# Altium PCB KBV1.3.PcbDoc
Units mil, origin at the board's own origin, x right, y up, seen from the top; angles counter-clockwise.
Board outline 11250.06 x 3738.1 mil, 2 copper layers (Top Layer, Bottom Layer); 151 components, 147 nets, 722 pads, 47 vias.
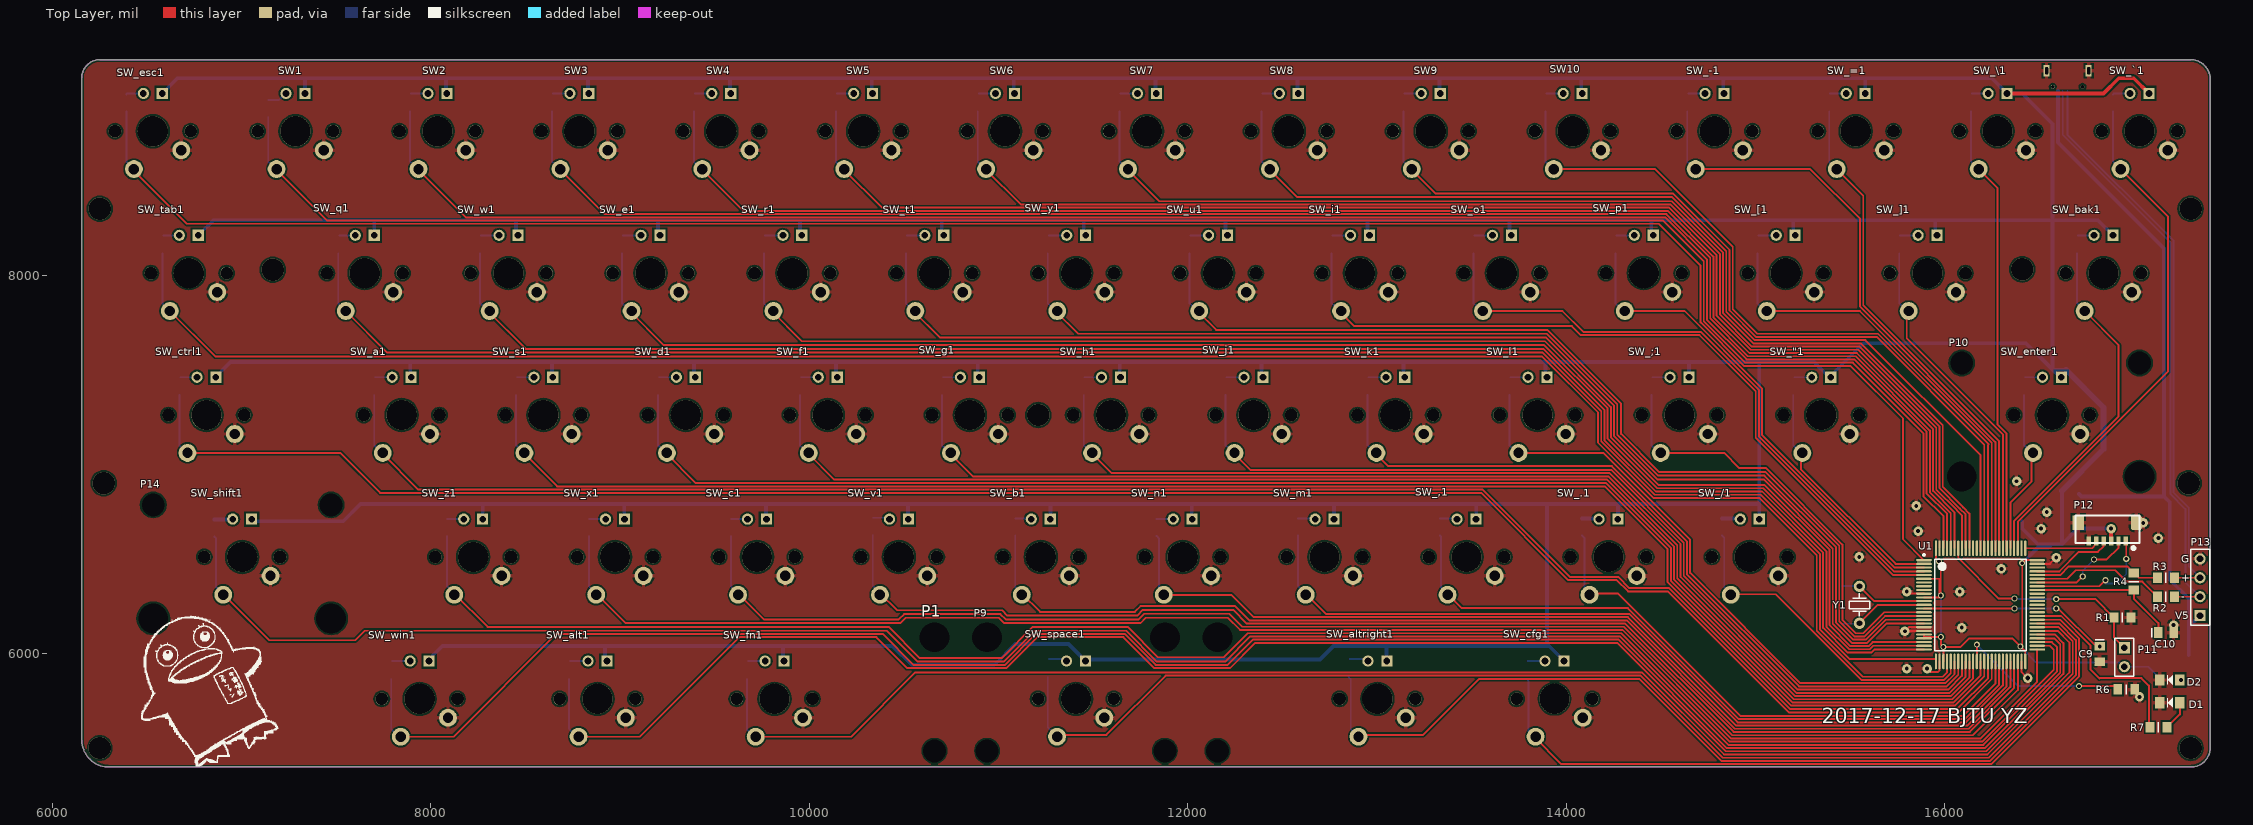
[diagram p0: Top Layer view]
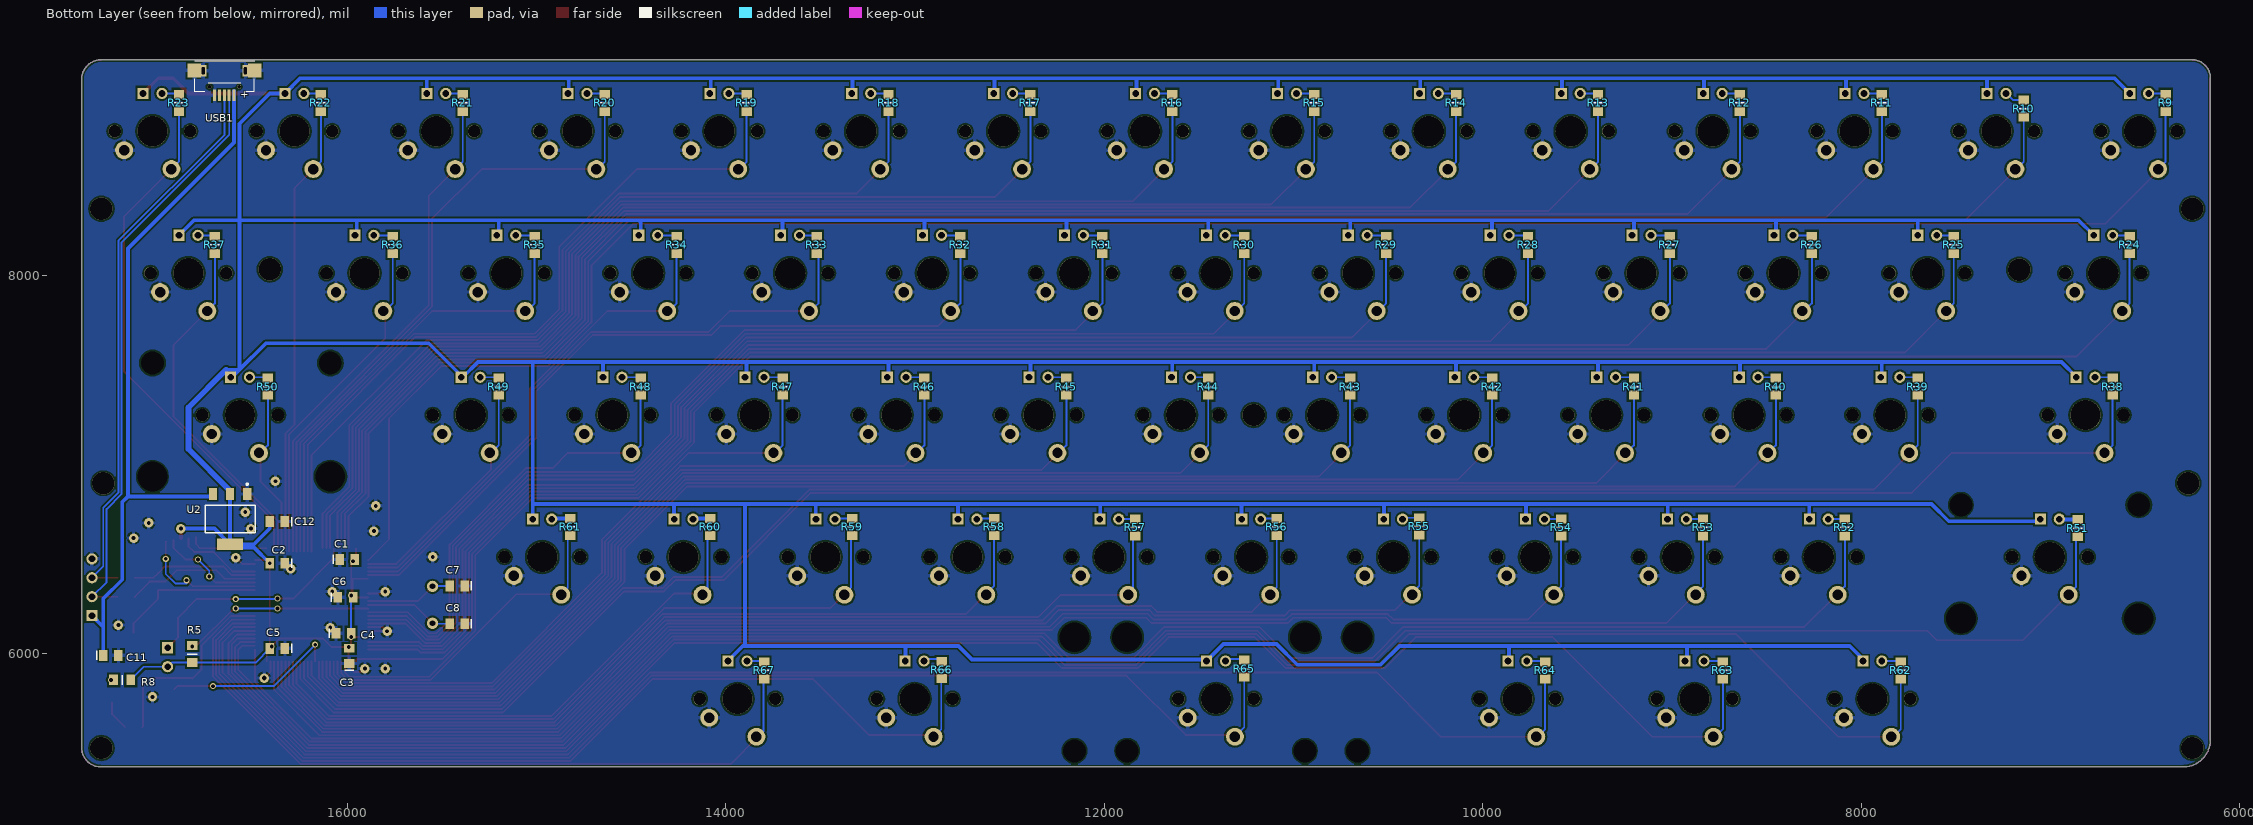
[diagram p1: Bottom Layer view, seen from below]

## Layer stack, top to bottom
Top Layer: signal copper 1.4
Dielectric: dielectric 12.6, FR-4, Dk 4.8
Bottom Layer: signal copper 1.4

## Board outline
6154.04,5540 6154.04,9042.15 cw(c6250,9042.15) 6250,9138.1 17300,9138.1 cw(c17300,9034) 17404.1,9034 17404.1,5500 cw(c17302.05,5502.05) 17300,5400 6300,5400 cw(c6297.02,5542.98)

## Design rules (kind name [scope] priority, off if disabled: settings)
Clearance [All] p1: gap=7
ComponentClearance [All] p1: gap=0 collisioncheckmode=3 verticalgap=0 showdistances=FALSE
HoleSize [All] p1: absolutevalues=TRUE maxlimit=300 minlimit=0 maxpercent=80.000 minpercent=20.000
MinimumSolderMaskSliver [All] p1: minsoldermaskwidth=1
PlaneConnect [All] p1: planeconnectstyle=Relief reliefexpansion=20 reliefentries=4 reliefconductorwidth=20 reliefairgap=10
PolygonConnect [All] p1: connectstyle=Relief reliefconductorwidth=20 reliefentries=4 polygonreliefangle="90 Angle"
RoutingVias [All] p1: holewidth=28 width=50 viastyle="Through Hole" minholewidth=2 minwidth=5 maxholewidth=280 maxwidth=500
SilkToSilkClearance [All] p1: silktosilkclearance=0
SilkscreenOverComponentPads [All] p1: minsilkscreentomaskgap=0
SolderMaskExpansion [All] p1: expansion=4
Width [All] p1: maxlimit=1000 minlimit=10 preferedwidth=20 minimp=50.000000 maximp=50.000000 favimp=50.000000
22 further rules are at their usual default settings.

## Classes and differential pairs
component class main: P1 P9 P10 R9 R10 R11 R12 R13 R14 R15 R16 R17 R18 R19 R20 R21 R22 R23 R24 R25 R26 R27 R28 R29 R30 R31 R32 R33 R34 R35 R36 R37 R38 R39 R40 R41 R42 R43 R44 R45 R46 R47 R48 R49 R50 R51 R52 R53 R54 R55 R56 R57 R58 R59 R60 R61 R62 R63 R64 R65 R66 R67 SW1 SW2 SW3 SW4 SW5 SW6 SW7 SW8 SW9 SW10 "SW_\"1" SW_,1 SW_-1 SW_.1 SW_/1 SW_;1 SW_=1 SW_[1 SW_\1 SW_]1 SW_`1 SW_a1 SW_alt1 SW_altright1 SW_b1 SW_bak1 SW_c1 SW_cfg1 SW_ctrl1 SW_d1 SW_e1 SW_enter1 SW_esc1 SW_f1 SW_fn1 SW_g1 SW_h1 SW_i1 SW_j1 SW_k1 SW_l1 SW_m1 SW_n1 SW_o1 SW_p1 SW_q1 SW_r1 SW_s1 SW_shift1 SW_space1 SW_t1 SW_tab1 SW_u1 SW_v1 SW_w1 SW_win1 SW_x1 SW_y1 SW_z1
component class STM32F103VE: C1 C2 C3 C4 C5 C6 C7 C8 C9 C10 C11 C12 D1 D2 P11 P12 P13 R1 R2 R3 R4 R5 R6 R7 R8 U1 U2 USB1 Y1

## Components (designator, comment, footprint, x,y, rotation, side; value= is the part's Value field where it differs from the comment)
C1 "Cap" CAP0805(2512) 16000,6497 r180 bottom
C2 "Cap" CAP0805(2512) 16370,6477 r0 bottom
C3 "Cap" CAP0805(2512) 15990,5987 r90 bottom
C4 "Cap" CAP0805(2512) 16020,6107 r180 bottom
C5 "Cap" CAP0805(2512) 16370,6027 r0 bottom
C6 "Cap" CAP0805(2512) 16010,6297 r180 bottom
C7 "Cap" CAP0805(2512) 15420,6357 r0 bottom
C8 "Cap" CAP0805(2512) 15420,6157 r0 bottom
C9 "Cap" CAP0805(2512) 16820,5997 r270 top
C10 "Cap" CAP0805(2512) 17170,6110 r0 top
C11 "Cap Pol2" CAP0805(2512) 17250,5990 r180 bottom
C12 "Cap" CAP0805(2512) 16370,6697 r0 bottom
D1 "LED0" DIODE_100mil 17190,5740 r0 top
D2 "LED0" DIODE_100mil 17190,5860 r0 top
P1 "卫星轴" 1x3 11409,5760 r180 top
P9 "卫星轴" 1x2 11409,5760 r180 top
P10 "卫星轴" 1x2 16560,7260 r0 top
P11 "下载时暂时短路再上电" HDR1X2 16950,6030 r270 top
P12 "SH1.0-6P 立贴" SH1.0-6P立 16860,6640 r180 top
P13 "Header 4" HDR1X4 17350,6200 r90 top
P14 "卫星轴" 1x2 7002,6510 r0 top (schematic designator P9)
R1 "Res2" RES0805(2012M) 16940,6190 r0 top
R2 "Res Semi" RES0805(2012M) 17170,6300 r180 top
R3 "Res Semi" RES0805(2012M) 17170,6400 r180 top
R4 "Res Semi" RES0805(2012M) 17000,6380 r90 top
R5 "Res Semi" RES0805(2012M) 16820,5997 r90 bottom
R6 "Res2" RES0805(2012M) 16960,5810 r180 top
R7 "Res2" RES0805(2012M) 17130,5610 r0 top
R8 "Res2" RES0805(2012M) 17190,5860 r0 bottom
R9 "Res2" RES0805(2012M) 6390,8910 r270 bottom
R10 "Res2" RES0805(2012M) 7140,8880 r270 bottom
R11 "Res2" RES0805(2012M) 7890,8910 r270 bottom
R12 "Res2" RES0805(2012M) 8640,8910 r270 bottom
R13 "Res2" RES0805(2012M) 9390,8910 r270 bottom
R14 "Res2" RES0805(2012M) 10140,8910 r270 bottom
R15 "Res2" RES0805(2012M) 10890,8910 r270 bottom
R16 "Res2" RES0805(2012M) 11640,8910 r270 bottom
R17 "Res2" RES0805(2012M) 12390,8910 r270 bottom
R18 "Res2" RES0805(2012M) 13140,8910 r270 bottom
R19 "Res2" RES0805(2012M) 13890,8910 r270 bottom
R20 "Res2" RES0805(2012M) 14640,8910 r270 bottom
R21 "Res2" RES0805(2012M) 15390,8910 r270 bottom
R22 "Res2" RES0805(2012M) 16140,8910 r270 bottom
R23 "Res2" RES0805(2012M) 16890,8910 r90 bottom
R24 "Res2" RES0805(2012M) 6580,8160 r270 bottom
R25 "Res2" RES0805(2012M) 7510,8160 r270 bottom
R26 "Res2" RES0805(2012M) 8260,8160 r270 bottom
R27 "Res2" RES0805(2012M) 9010,8160 r270 bottom
R28 "Res2" RES0805(2012M) 9760,8160 r270 bottom
R29 "Res2" RES0805(2012M) 10510,8160 r270 bottom
R30 "Res2" RES0805(2012M) 11260,8160 r270 bottom
R31 "Res2" RES0805(2012M) 12010,8160 r270 bottom
R32 "Res2" RES0805(2012M) 12760,8160 r270 bottom
R33 "Res2" RES0805(2012M) 13520,8160 r270 bottom
R34 "Res2" RES0805(2012M) 14260,8160 r270 bottom
R35 "Res2" RES0805(2012M) 15010,8160 r270 bottom
R36 "Res2" RES0805(2012M) 15760,8160 r270 bottom
R37 "Res2" RES0805(2012M) 16700,8160 r270 bottom
R38 "Res2" RES0805(2012M) 6670,7410 r270 bottom
R39 "Res2" RES0805(2012M) 7700,7410 r270 bottom
R40 "Res2" RES0805(2012M) 8450,7410 r270 bottom
R41 "Res2" RES0805(2012M) 9200,7410 r270 bottom
R42 "Res2" RES0805(2012M) 9950,7410 r270 bottom
R43 "Res2" RES0805(2012M) 10700,7410 r270 bottom
R44 "Res2" RES0805(2012M) 11450,7410 r270 bottom
R45 "Res2" RES0805(2012M) 12200,7410 r270 bottom
R46 "Res2" RES0805(2012M) 12950,7410 r270 bottom
R47 "Res2" RES0805(2012M) 13700,7410 r270 bottom
R48 "Res2" RES0805(2012M) 14450,7410 r270 bottom
R49 "Res2" RES0805(2012M) 15200,7410 r270 bottom
R50 "Res2" RES0805(2012M) 16420,7410 r270 bottom
R51 "Res2" RES0805(2012M) 6855,6663 r270 bottom
R52 "Res2" RES0805(2012M) 8085,6666 r270 bottom
R53 "Res2" RES0805(2012M) 8835,6666 r270 bottom
R54 "Res2" RES0805(2012M) 9585,6666 r270 bottom
R55 "Res2" RES0805(2012M) 10335,6672 r270 bottom
R56 "Res2" RES0805(2012M) 11088,6669 r270 bottom
R57 "Res2" RES0805(2012M) 11835,6666 r270 bottom
R58 "Res2" RES0805(2012M) 12582,6669 r270 bottom
R59 "Res2" RES0805(2012M) 13332,6669 r270 bottom
R60 "Res2" RES0805(2012M) 14082,6669 r270 bottom
R61 "Res2" RES0805(2012M) 14823,6669 r270 bottom
R62 "Res2" RES0805(2012M) 7790,5910 r270 bottom
R63 "Res2" RES0805(2012M) 8730,5910 r270 bottom
R64 "Res2" RES0805(2012M) 9670,5910 r270 bottom
R65 "Res2" RES0805(2012M) 11260,5920 r270 bottom
R66 "Res2" RES0805(2012M) 12858,5913 r270 bottom
R67 "Res2" RES0805(2012M) 13797,5910 r270 bottom
SW1 "" MX_SW-5 7284,8760 r0 top
SW2 "" MX_SW-5 8034,8760 r0 top
SW3 "" MX_SW-5 8784,8760 r0 top
SW4 "" MX_SW-5 9534,8760 r0 top
SW5 "" MX_SW-5 10284,8760 r0 top
SW6 "" MX_SW-5 11034,8760 r0 top
SW7 "" MX_SW-5 11784,8760 r0 top
SW8 "" MX_SW-5 12534,8760 r0 top
SW9 "" MX_SW-5 13284,8760 r0 top
SW10 "" MX_SW-5 14034,8760 r0 top
"SW_\"1" "" MX_SW-5 15348,7260 r0 top
SW_,1 "" MX_SW-5 13473,6510 r0 top
SW_-1 "" MX_SW-5 14784,8760 r0 top
SW_.1 "" MX_SW-5 14223,6510 r0 top
SW_/1 "" MX_SW-5 14970,6510 r0 top
SW_;1 "" MX_SW-5 14599,7260 r0 top
SW_=1 "" MX_SW-5 15530,8760 r0 top
SW_[1 "" MX_SW-5 15160,8010 r0 top
SW_\1 "" MX_SW-5 16280,8760 r0 top
SW_]1 "" MX_SW-5 15910,8010 r0 top
SW_`1 "" MX_SW-5 17030,8760 r0 top
SW_a1 "" MX_SW-5 7845,7260 r0 top
SW_alt1 "" MX_SW-5 8880,5760 r0 top
SW_altright1 "" MX_SW-5 13002,5760 r0 top
SW_b1 "" MX_SW-5 11223,6510 r0 top
SW_bak1 "" MX_SW-5 16840,8010 r0 top
SW_c1 "" MX_SW-5 9723,6510 r0 top
SW_cfg1 "" MX_SW-5 13938,5760 r0 top
SW_ctrl1 "" MX_SW-5 6813,7260 r0 top
SW_d1 "" MX_SW-5 9347,7260 r0 top
SW_e1 "" MX_SW-5 9160,8010 r0 top
SW_enter1 "" MX_SW-5 16567,7260 r0 top
SW_esc1 "" MX_SW-5 6530,8760 r0 top
SW_f1 "" MX_SW-5 10097,7260 r0 top
SW_fn1 "" MX_SW-5 9816,5760 r0 top
SW_g1 "" MX_SW-5 10848,7260 r0 top
SW_h1 "" MX_SW-5 11594,7260 r0 top
SW_i1 "" MX_SW-5 12910,8010 r0 top
SW_j1 "" MX_SW-5 12347,7260 r0 top
SW_k1 "" MX_SW-5 13097,7260 r0 top
SW_l1 "" MX_SW-5 13848,7260 r0 top
SW_m1 "" MX_SW-5 12723,6510 r0 top
SW_n1 "" MX_SW-5 11973,6510 r0 top
SW_o1 "" MX_SW-5 13660,8010 r0 top
SW_p1 "" MX_SW-5 14410,8010 r0 top
SW_q1 "" MX_SW-5 7650,8010 r0 top
SW_r1 "" MX_SW-5 9910,8010 r0 top
SW_s1 "" MX_SW-5 8594,7260 r0 top
SW_shift1 "" MX_SW-5 7002,6510 r0 top
SW_space1 "" MX_SW-5 11409,5760 r0 top
SW_t1 "" MX_SW-5 10660,8010 r0 top
SW_tab1 "" MX_SW-5 6720,8010 r0 top
SW_u1 "" MX_SW-5 12160,8010 r0 top
SW_v1 "" MX_SW-5 10473,6510 r0 top
SW_w1 "" MX_SW-5 8410,8010 r0 top
SW_win1 "" MX_SW-5 7940,5760 r0 top
SW_x1 "" MX_SW-5 8973,6510 r0 top
SW_y1 "" MX_SW-5 11410,8010 r0 top
SW_z1 "" MX_SW-5 8223,6510 r0 top
U1 "STM32F103VET6" LQFP-100 16190,6257 r0 top
U2 "REG1117-3.3" ZZ311 16620,6710 r0 bottom
USB1 "USB" MICRO-USB 16650,9060 r0 bottom
Y1 "XTAL" XTAL_0.4 15550,6257 r90 top

## Footprints (in the part's own frame and the unit in brackets; to place one, negate y for a bottom-side part, rotate by r counter-clockwise, add the part's x,y. Pads: shape width x height; smd on the part's side, far side on the other; paste and mask are expansions set on the pad)
1x2 [mil]
  round 0 hole 120: 0(-470,275) 3(470,275)
  round 0 hole 157: 1(-470,-325) 4(470,-325)
1x3 [mil]
  round 0 hole 120: 0(-748.03,275) 3(748.03,275)
  round 0 hole 157: 1(-748.03,-325) 4(748.03,-325)
CAP0805(2512) [mm]
  rect 1.15x1.45 smd: 1(-1.016,0) 2(1.016,0)
  silkscreen extent -1.9,-0.6 -1.9,0.6, body extent -1.1,-0.72 1.1,0.72, height 1.4
DIODE_100mil [mil]
  rect 50x60 smd: 1(53.15,0) 2(-53.15,0)
  silkscreen extent -15,-25 15,25, body extent -67,-35 67,35, height 22
HDR1X2 [mm] "Connector; Header; 2 Position"
  rect 1.5x1.5 hole 0.9: 1(0,0)
  round 1.5 hole 0.9: 2(2.54,0)
  silkscreen extent -1.27,-1.27 3.81,1.27
HDR1X4 [mm] "Connector; Header; 4 Position"
  rect 1.5x1.5 hole 0.9: 1(0,0)
  round 1.5 hole 0.9: 2(2.54,0) 3(5.08,0) 4(7.62,0)
  silkscreen extent -1.27,-1.27 8.89,1.27
LQFP-100 [mm] "100-Pin Thin Quad Flat Pack 0.5 mm Pitch, IPC Low Density"
  oval 2.1x0.3 smd: 1(-7.6,6) 2(-7.6,5.5) 3(-7.6,5) 4(-7.6,4.5) 5(-7.6,4) 6(-7.6,3.5) 7(-7.6,3) 8(-7.6,2.5) 9(-7.6,2) 10(-7.6,1.5) 11(-7.6,1) 12(-7.6,0.5) 13(-7.6,0) 14(-7.6,-0.5) 15(-7.6,-1) 16(-7.6,-1.5) 17(-7.6,-2) 18(-7.6,-2.5) 19(-7.6,-3) 20(-7.6,-3.5) 21(-7.6,-4) 22(-7.6,-4.5) 23(-7.6,-5) 24(-7.6,-5.5) 25(-7.6,-6) 51(7.6,-6) 52(7.6,-5.5) 53(7.6,-5) 54(7.6,-4.5) 55(7.6,-4) 56(7.6,-3.5) 57(7.6,-3) 58(7.6,-2.5) 59(7.6,-2) 60(7.6,-1.5) 61(7.6,-1) 62(7.6,-0.5) 63(7.6,0) 64(7.6,0.5) 65(7.6,1) 66(7.6,1.5) 67(7.6,2) 68(7.6,2.5) 69(7.6,3) 70(7.6,3.5) 71(7.6,4) 72(7.6,4.5) 73(7.6,5) 74(7.6,5.5) 75(7.6,6)
  oval 0.3x2.1 smd: 26(-6,-7.6) 27(-5.5,-7.6) 28(-5,-7.6) 29(-4.5,-7.6) 30(-4,-7.6) 31(-3.5,-7.6) 32(-3,-7.6) 33(-2.5,-7.6) 34(-2,-7.6) 35(-1.5,-7.6) 36(-1,-7.6) 37(-0.5,-7.6) 38(0,-7.6) 39(0.5,-7.6) 40(1,-7.6) 41(1.5,-7.6) 42(2,-7.6) 43(2.5,-7.6) 44(3,-7.6) 45(3.5,-7.6) 46(4,-7.6) 47(4.5,-7.6) 48(5,-7.6) 49(5.5,-7.6) 50(6,-7.6) 76(6,7.6) 77(5.5,7.6) 78(5,7.6) 79(4.5,7.6) 80(4,7.6) 81(3.5,7.6) 82(3,7.6) 83(2.5,7.6) 84(2,7.6) 85(1.5,7.6) 86(1,7.6) 87(0.5,7.6) 88(0,7.6) 89(-0.5,7.6) 90(-1,7.6) 91(-1.5,7.6) 92(-2,7.6) 93(-2.5,7.6) 94(-3,7.6) 95(-3.5,7.6) 96(-4,7.6) 97(-4.5,7.6) 98(-5,7.6) 99(-5.5,7.6) 100(-6,7.6)
  silkscreen extent -7.72,-6.15 6.15,6.82, body extent -7,-5.98 7,8.02, height 1.05
MICRO-USB [mm]
  rect 0.4x1.55 smd: 1(-1.3,2.794) 2(-0.65,2.794) 3(0,2.794) 4(0.65,2.794) 5(1.3,2.794)
  rect 1.8x1.9 smd: 6(-4.05,-0.55) 6(4.05,-0.55)
  rect 0.8x1.5 hole 0.4 slot 1 at 90 deg: 6(-2.825,-0.5) 6(2.825,-0.5)
  round 0.5 hole 0.5 unplated: ""(-2,1.65) ""(2,1.65)
  silkscreen extent -4.05,-1.8 4,2.3
MX_SW-5 [mm] "with Fixation pins  1-Pole w/LED"
  round 2.4 hole 1.4: 1(3.81,-2.54) 2(-2.54,-5.08)
  rect 1.5x1.5 hole 0.9: 3(1.27,5.08)
  round 1.5 hole 0.9: 4(-1.27,5.08)
  round 1.702 hole 1.702: ""(-5.08,0) ""(5.08,0)
  round 4.064 hole 4.064: ""(0,0)
RES0805(2012M) [mm]
  rect 1.2x1.4 smd: 1(-1.143,0) 2(1.143,0)
  silkscreen extent 0,-0.65 0,0.65, body extent -1.07,-0.7 1.07,0.7, height 0.7
SH1.0-6P立 [mm]
  rrect50% 1.5x2 smd: 0(-3.9,-1.286)
  rect 1.5x2 smd: 0(3.9,-1.286)
  rect 0.6x1.2 smd: 1(-2.5,1.186) 2(-1.5,1.186) 3(-0.5,1.186) 4(0.5,1.186) 5(1.5,1.186) 6(2.5,1.186)
  silkscreen extent -4.3,-2.29 4.28,2.27, body extent -4,-2.02 4,1.58, height 4.3
XTAL_0.4 [mil]
  round 60 hole 30: 1(97.5,0) 2(-97.5,0)
  silkscreen extent -60,-55 60,55, body extent -236,-87 236,87, height 150
ZZ311 [mm] "SOT-223/SC-73; 4 Leads; Body 6.7 x 7.3 mm, inc. leads (LxW max)"
  rect 1.1x1.55 smd: 1(-2.3,-3.375) 2(0,-3.375) 3(2.3,-3.375)
  rect 3.45x1.55 smd: 4(0,3.375)
  silkscreen extent -3.35,-4.82 3.35,1.85

## Part data
C1 C2 C3 C4 C5 C6 C7 C8 C9 C10 C12: "Capacitor"
C11: "Polarized Capacitor (Axial)"
D1 D2: "Typical INFRARED GaAs LED"
P1: library part "Header 2", "Heade"
P9 P10 P14: library part "Header 2", "H"
P11: library part "Header 2", "Header, 2-Pin"
P12: library part "Header 7", "Header, 7-Pin"
P13: "Header, 4-Pin"
R1 R6 R7 R8 R9 R10 R11 R12 R13 R14 R15 R16 R17 R18 R19 R20 R21 R22 R23 R24 R25 R26 R27 R28 R29 R30 R31 R32 R33 R34 R35 R36 R37 R38 R39 R40 R41 R42 R43 R44 R45 R46 R47 R48 R49 R50 R51 R52 R53 R54 R55 R56 R57 R58 R59 R60 R61 R62 R63 R64 R65 R66 R67: "Resistor"
R2 R3 R4 R5: "Semiconductor Resistor"
SW1 SW2 SW3 SW4 SW5 SW6 SW7 SW8 SW9 SW10 "SW_\"1" SW_,1 SW_-1 SW_.1 SW_/1 SW_;1 SW_=1 SW_[1 SW_\1 SW_]1 SW_`1 SW_a1 SW_alt1 SW_altright1 SW_b1 SW_bak1 SW_c1 SW_cfg1 SW_ctrl1 SW_d1 SW_e1 SW_enter1 SW_esc1 SW_f1 SW_fn1 SW_g1 SW_h1 SW_i1 SW_j1 SW_k1 SW_l1 SW_m1 SW_n1 SW_o1 SW_p1 SW_q1 SW_r1 SW_s1 SW_shift1 SW_space1 SW_t1 SW_tab1 SW_u1 SW_v1 SW_w1 SW_win1 SW_x1 SW_y1 SW_z1: library part MX_SW-5, "with Fixation pins  1-Pole w/LED"
U1: library part STM32F103VBT6, "STM32 ARM-based 32-bit MCU with 64 Kbytes Flash, 100-pin LQFP, Industrial Temperature"
U2: "800mA and 1A Low Dropout Positive Regulator 2.85V, 3.3V, 5V, and Adjustable"
Y1: "Crystal Oscillator"

## Via types
v1: diameter 50, hole 20, Top Layer to Bottom Layer, 19 vias
v2: diameter 32, hole 20, Top Layer to Bottom Layer, 18 vias
v3: diameter 118.11, hole 118.11, Top Layer to Bottom Layer, 9 vias
v4: diameter 50, hole 25, Top Layer to Bottom Layer, 1 vias

## Nets (pads, with @x,y where several pads share a name; then routed paths per layer and width w, separated by ;. In a path a pad name is that pad's centre, name@x,y a point inside that pad or via, vN(x,y) a via of type N, cw(c..) or ccw(c..) an arc to the next point about the centre after c; other vN are vias at no path point)
BOOT0: P11.1 R1.1 U1.94 | length 1187.1
  Top Layer w10: U1.94 16071.89,6505.11 16287,6290 v2(16370,6290) ; v2(16590,6287) 16799,6287 ; 16799,6286 R1.1 16895,6085 P11.1
  Bottom Layer w10: v2(16370,6290) 16373,6287 v2(16590,6287)
BOOT1: R6.2 U1.37 | length 941.6
  Top Layer w10: v2@16170,6037 v2(16170,6046.37) 16170.32,6046.69 U1.37 ; v2(16710,5827) 16898,5827 R6.2
  Bottom Layer w10: v2(16170,6046.37) 16389.37,5827 v2(16710,5827)
BT1: R10.2 SW1.2 U1.98 | length 10417.4
  Top Layer w10: SW1.2@7175,8555 7185,8555 7452,8288 14512,8288 14727,8073 14727,7756.63 14946.63,7537 15515,7537 15888,7164 15888,6832 15993.15,6726.85 U1.98
  Bottom Layer w10: R10.2 7140,8600 SW1.2@7180,8560
BT2: R11.2 SW2.2 U1.97 | length 9718.9
  Top Layer w10: SW2.2@7930,8560 8185,8305 14522.67,8305 14744,8083.67 14744,7763.67 14953.67,7554 15522.04,7554 15905,7171.04 15905,6844.79 ; 15905.1,6844.9 16012.83,6737.17 U1.97
  Bottom Layer w10: R11.2 7890,8600 SW2.2@7930,8560
BT3: R12.2 SW3.2 U1.96 | length 8991.1
  Top Layer w10: SW3.2@8680,8560 8918,8322 14529.71,8322 14761,8090.71 14761,7770.71 14960.71,7571 15529.08,7571 15922,7178.08 15922,6852.04 16029.83,6744.21 16029.83,6744 16032.52,6741.31 U1.96
  Bottom Layer w10: R12.2 8640,8600 SW3.2@8680,8560
BT4: R13.2 SW4.2 U1.95 | length 8263.3
  Top Layer w10: SW4.2@9430,8560 9651,8339 14536.75,8339 14778,8097.75 14778,7777.75 14967.75,7588 15536.12,7588 15939,7185.12 15939,6859.08 16046.83,6751.25 16046.83,6751.04 16052.2,6745.67 U1.95
  Bottom Layer w10: R13.2 9390,8600 SW4.2@9430,8560
BT5: R14.2 SW5.2 U1.93 | length 7543.7
  Top Layer w10: SW5.2@10180,8560 10384,8356 14543.79,8356 14795,8104.79 14795,7784.79 14974.79,7605 15543.17,7605 15956,7192.17 15956,6866.12 16063.83,6758.29 16063.83,6758.08 16091.57,6730.34 U1.93
  Bottom Layer w10: R14.2 10140,8600 SW5.2@10180,8560
BT6: R15.2 SW6.2 U1.92 | length 6815.9
  Top Layer w10: SW6.2@10930,8560 11117,8373 14550.83,8373 14812,8111.83 14812,7791.83 14981.83,7622 15550.21,7622 15973,7199.21 15973,6873.17 16080.83,6765.33 16080.83,6765.12 16111.26,6734.7 U1.92
  Bottom Layer w10: R15.2 10890,8600 SW6.2@10930,8560
BT7: R16.2 SW7.2 U1.91 | length 6088.2
  Top Layer w10: SW7.2@11680,8560 11850,8390 14557.88,8390 14829,8118.88 14829,7798.88 14988.88,7639 15557.25,7639 15990,7206.25 15990,6880.21 16097.83,6772.37 16097.83,6772.17 16130.94,6739.06 U1.91
  Bottom Layer w10: R16.2 11640,8600 SW7.2@11680,8560
BT8: R17.2 SW8.2 U1.88 | length 5403.7
  Top Layer w10: SW8.2@12430,8560 12577,8413 14558.92,8413 14846,8125.92 14846,7805.92 14995.92,7656 15581.32,7656 16190,7047.31 U1.88@16190,6539.21
  Bottom Layer w10: R17.2 12390,8600 SW8.2@12430,8560
BT9: R18.2 SW9.2 U1.87 | length 4706.7
  Top Layer w10: SW9.2@13180,8560 13310,8430 14565.96,8430 14863,8132.96 14863,7812.96 15002.96,7673 15640.83,7673 16209.68,7104.15 U1.87@16209.68,6539.21
  Bottom Layer w10: R18.2 13140,8600 SW9.2@13180,8560
BT10: R19.2 SW10.2 U1.86 | length 3987
  Top Layer w10: SW10.2@13930,8560 14470,8560 14880,8150 14880,7820 15010,7690 15647.88,7690 16232.06,7105.82 16229.37,7103.14 U1.86@16229.37,6539.21
  Bottom Layer w10: R19.2 13890,8600 SW10.2@13930,8560
"BT\"": "SW_\"1.2" R49.2 U1.2 | length 1265.6
  Top Layer w10: 15240,7060 15240,6974.04 15740.51,6473.54 U1.2
  Bottom Layer w10: R49.2 15200,7100 15240,7060
BT,: R59.2 SW_,1.2 U1.43 | length 3712.7
  Top Layer w10: 13373,6316 13449,6240 14325.96,6240 14912.96,5653 16105.54,5653 16288.43,5835.88 U1.43
  Bottom Layer w10: R59.2 13338,6618 13338,6351 13373,6316
BT-: R20.2 SW_-1.2 U1.84 | length 3357.8
  Top Layer w10: SW_-1.2@14680,8560 15290,8560 15553,8297 15553,7832.96 16268.74,7117.22 U1.84@16268.74,6539.21
  Bottom Layer w10: R20.2 14640,8600 SW_-1.2@14680,8560
BT.: R60.2 SW_.1.2 U1.42 | length 2926.4
  Top Layer w10: SW_.1.2@14123,6316 14274,6316 14920,5670 16098.5,5670 16268.74,5840.24 U1.42
  Bottom Layer w10: R60.2 14097,6609 14097,6342 SW_.1.2@14123,6316
BT/: R61.2 SW_/1.2 U1.30 | length 1757.6
  Top Layer w10: SW_/1.2@14870,6313 15107,6313 15560,5860 15997.04,5860 16032.52,5895.48 U1.30
  Bottom Layer w10: R61.2 14835,6612 14835,6348 SW_/1.2@14870,6313
BT;: R48.2 SW_;1.2 U1.15 | length 2396.3
  Top Layer w10: 14490,7060 14834.04,7060 14913.04,6981 15054.33,6981 15460,6575.33 15460,6177 15530,6107 15570,6107 15680.63,6217.63 U1.15
  Bottom Layer w10: R48.2 14450,7100 14490,7060
BT=: R21.2 SW_=1.2 U1.83 | length 2697.9
  Top Layer w10: SW_=1.2 15570,8420 15570,7840 16288.43,7121.57 U1.83@16288.43,6539.21
  Bottom Layer w10: R21.2 15390,8600 SW_=1.2
BT[: R35.2 SW_[1.2 U1.85 | length 2383
  Top Layer w10: SW_[1.2@15050,7810 15551.92,7810 16249.06,7112.86 U1.85@16249.06,6539.21
  Bottom Layer w10: R35.2 15010,7850 SW_[1.2@15050,7810
BT]: R36.2 SW_]1.2 U1.82 | length 1802.8
  Top Layer w10: SW_]1.2@15800,7810 15800,7665.96 16308.11,7157.85 U1.82 U1.82@16308.11,6539.21
  Bottom Layer w10: R36.2 15760,7850 SW_]1.2@15800,7810
BT_?: R22.2 SW_\1.2 U1.81 | length 2403.6
  Top Layer w10: SW_\1.2 16280,8460 16280,7210 16327.8,7162.2 U1.81@16327.8,6539.21
  Bottom Layer w10: R22.2 16140,8600 SW_\1.2
BT`: R23.1 SW_`1.2 U1.78 | length 2757.4
  Top Layer w10: U1.78 16386.85,6696.85 17180,7490 17180,8310 SW_`1.2
  Bottom Layer w10: R23.1 16890,8600 SW_`1.2
BTA: R39.2 SW_a1.2 U1.40 | length 9527
  Top Layer w10: SW_a1.2@7740,7060 7934,6866 13558,6866 14019,6405 14274,6405 14334,6345 14543.67,6345 15181.67,5707 16067,5707 16229.37,5869.37 U1.40
  Bottom Layer w10: R39.2 7700,7100 SW_a1.2@7740,7060
BTALT: R63.2 SW_alt1.2 U1.55 | length 9382.3
  Top Layer w10: SW_alt1.2@8770,5560 9104,5560 9630,6086 10354,6086 10517,5923 11041.08,5923 11204.08,6086 11659.96,6086 11822.96,5923 12223,5923 12356,6056 14269.54,6056 14842.54,5483 16219.17,5483 16628,5891.83 16628,6055.17 16583.65,6099.52 U1.55
  Bottom Layer w10: R63.2 8730,5600 SW_alt1.2@8770,5560
BTALTRIGHT: R66.2 SW_altright1.2 U1.58 | length 5042.3
  Top Layer w10: SW_altright1.2@12890,5570 13244,5570 13540,5866 14386.16,5866 14820.16,5432 16240.29,5432 16694,5885.71 16694,6071.08 16606.51,6158.57 U1.58
  Bottom Layer w10: R66.2@12850,5875 12861,5864 12861,5599 SW_altright1.2@12890,5570
BTB: R56.2 SW_b1.2 U1.46 | length 6094
  Top Layer w10: SW_b1.2@11123,6316 11219,6220 11720,6220 11750,6250 12250,6250 12325,6175 14318.83,6175 14891.83,5602 16126.67,5602 16347.48,5822.81 U1.46
  Bottom Layer w10: R56.2 11088,6351 SW_b1.2@11123,6316
BTBAK: R37.2 SW_bak1.2 U1.79 | length 1878.9
  Top Layer w10: U1.79 16367.17,6701.21 16920,7254.04 16920,7630 SW_bak1.2
  Bottom Layer w10: R37.2 16700,7850 SW_bak1.2
BTC: R54.2 SW_c1.2 U1.48 | length 7692.8
  Top Layer w10: SW_c1.2@9623,6316 9759,6180 10471.72,6180 10500.22,6208.5 11009.78,6208.5 11038.28,6180 11740,6180 11770,6210 12220,6210 12289,6141 14304.75,6141 14877.75,5568 16148,5568 16386.85,5806.85 U1.48
  Bottom Layer w10: R54.2 9585,6354 SW_c1.2@9623,6316
BTCFG: R67.2 SW_cfg1.2 U1.59 | length 3917.4
  Top Layer w10: SW_cfg1.2@13830,5560 13975,5415 16247.33,5415 16711,5878.67 16711,6078.12 16610.87,6178.26 U1.59
  Bottom Layer w10: R67.2@13790,5865 13800,5855 13800,5590 SW_cfg1.2@13830,5560
BTCTRL: R38.2 SW_ctrl1.2 U1.41 | length 10595.8
  Top Layer w10: SW_ctrl1.2@6710,7060 SW_ctrl1.2 7520,7060 7731,6849 13550.96,6849 14011.96,6388 14266.96,6388 14326.96,6328 14536.63,6328 15177.63,5687 16071.04,5687 16249.06,5865.01 U1.41
  Bottom Layer w10: R38.2 6670,7100 SW_ctrl1.2@6710,7060
BTD: R41.2 SW_d1.2 U1.38 | length 8053.2
  Top Layer w10: SW_d1.2@9240,7060 9400,6900 14211.08,6900 14553,6558.08 14553,6383.75 15195.75,5741 16047.17,5741 16190,5883.83 U1.38
  Bottom Layer w10: R41.2 9200,7100 SW_d1.2@9240,7060
BTE: R27.2 SW_e1.2 U1.24 | length 8237.5
  Top Layer w10: SW_e1.2@9050,7810 9230,7630 13883.83,7630 14219,7294.83 14219,7135.12 14481.12,6873 15042.12,6873 15375,6540.12 15375,6141.79 15494.79,6022 15605.21,6022 15623.67,6040.46 U1.24
  Bottom Layer w10: R27.2 9010,7850 SW_e1.2@9050,7810
BTENTER: R50.2 SW_enter1.2 U1.80 | length 872
  Top Layer w10: U1.80 16347.48,6797.48 16460,6910 SW_enter1.2@16460,7060
  Bottom Layer w10: R50.2 16420,7100 SW_enter1.2@16460,7060
BTESC: R9.2 SW_esc1.2 U1.1 | length 11194
  Top Layer w10: SW_esc1.2@6420,8550 6430,8550 6709,8271 14489,8271 14710,8050 14710,7749.58 14939.58,7520 15502,7520 15780,7242 15780,6604.01 U1.1
  Bottom Layer w10: R9.2 6390,8600 SW_esc1.2
BTF: R42.2 SW_f1.2 U1.36 | length 7258.7
  Top Layer w10: SW_f1.2@9990,7060 10131,6919 14216.12,6919 14570,6565.12 14570,6390.79 15202.79,5758 16040.12,5758 16150.63,5868.51 U1.36
  Bottom Layer w10: R42.2 9950,7100 SW_f1.2@9990,7060
BTFN: R64.2 SW_fn1.2 U1.56 | length 8125.6
  Top Layer w10: SW_fn1.2@9710,5560 10220,5560 10560,5900 14400.24,5900 14834.24,5466 16226.21,5466 16660,5899.79 16660,6057 16597.8,6119.2 U1.56
  Bottom Layer w10: R64.2 9670,5600 SW_fn1.2@9710,5560
BTG: R43.2 SW_g1.2 U1.35 | length 6472.4
  Top Layer w10: SW_g1.2@10740,7060 10864,6936 14223.17,6936 14587,6572.17 14587,6397.83 15209.83,5775 16033.08,5775 16130.94,5872.86 U1.35
  Bottom Layer w10: R43.2 10700,7100 SW_g1.2@10740,7060
BTH: R44.2 SW_h1.2 U1.34 | length 5686
  Top Layer w10: SW_h1.2@11490,7060 11597,6953 14230.21,6953 14604,6579.21 14604,6404.88 15216.88,5792 16026.04,5792 16111.26,5877.22 U1.34
  Bottom Layer w10: R44.2 11450,7100 SW_h1.2@11490,7060
BTI: R32.2 SW_i1.2 U1.5 | length 4134.2
  Top Layer w10: SW_i1.2@12800,7810 12880,7730 14030,7730 14077,7683 14704.46,7683 15001.54,7385.92 15001.54,7140.37 15727.44,6414.48 U1.5
  Bottom Layer w10: R32.2 12760,7850 SW_i1.2@12800,7810
BTJ: R45.2 SW_j1.2 U1.33 | length 4899.7
  Top Layer w10: SW_j1.2@12240,7060 12330,6970 14237.25,6970 14621,6586.25 14621,6411.92 15223.92,5809 16019,5809 16091.57,5881.57 U1.33
  Bottom Layer w10: R45.2 12200,7100 SW_j1.2@12240,7060
BTK: R46.2 SW_k1.2 U1.32 | length 4112.9
  Top Layer w10: SW_k1.2@12990,7060 13060,6990 14241.29,6990 14638,6593.29 14638,6418.96 15230.96,5826 16011.12,5826 16071.89,5886.77 U1.32
  Bottom Layer w10: R46.2 12950,7100 SW_k1.2@12990,7060
BTL: R47.2 SW_l1.2 U1.31 | length 3326.6
  Top Layer w10: SW_l1.2@13740,7060 14195.33,7060 14655,6600.33 14655,6426 15238,5843 16004.08,5843 16052.2,5891.12 U1.31
  Bottom Layer w10: R47.2 13700,7100 SW_l1.2@13740,7060
BTM: R58.2 SW_m1.2 U1.44 | length 4499
  Top Layer w10: SW_m1.2@12623,6316 12730,6209 14332.92,6209 14905.92,5636 16112.58,5636 16308.11,5831.53 U1.44
  Bottom Layer w10: R58.2 12582,6357 SW_m1.2@12623,6316
BTN: R57.2 SW_n1.2 U1.45 | length 5281.6
  Top Layer w10: SW_n1.2 12230,6310 12348,6192 14325.88,6192 14898.88,5619 16119.62,5619 16327.8,5827.17 U1.45
  Bottom Layer w10: R57.2 11847,6609 11847,6339 SW_n1.2@11873,6313
BTO: R33.2 SW_o1.2 U1.4 | length 3366.1
  Top Layer w10: SW_o1.2 13980,7810 14090,7700 14711.5,7700 15018.54,7392.96 15018.54,7147.42 15731.79,6434.17 15748.79,6434.17 U1.4
  Bottom Layer w10: R33.2@13510,8115 13510,7850 SW_o1.2@13550,7810
BTP: R34.2 SW_p1.2 U1.3 | length 2617.9
  Top Layer w10: SW_p1.2@14300,7810 14625.54,7810 15035.54,7400 15035.54,7154.46 15736.15,6453.85 U1.3
  Bottom Layer w10: R34.2 14260,7850 SW_p1.2@14300,7810
BTQ: R25.2 SW_q1.2 U1.26 | length 9824.4
  Top Layer w10: SW_q1.2 7770,7590 13875.75,7590 14185,7280.75 14185,7121.04 14467.04,6839 15028.04,6839 15341,6526.04 15341,6127.71 15498.71,5970 15950,5970 15953.78,5966.22 U1.26
  Bottom Layer w10: R25.2 7510,7850 SW_q1.2
BTR: R28.2 SW_r1.2 U1.23 | length 7481.6
  Top Layer w10: SW_r1.2@9800,7810 9960,7650 13887.88,7650 14236,7301.88 14236,7142.17 14488.17,6890 15049.17,6890 15392,6547.17 15392,6148.83 15501.83,6039 15598.17,6039 15619.32,6060.15 U1.23
  Bottom Layer w10: R28.2 9760,7850 SW_r1.2@9800,7810
BTS: R40.2 SW_s1.2 U1.39 | length 8839.5
  Top Layer w10: SW_s1.2@8490,7060 8667,6883 14204.04,6883 14536,6551.04 14536,6376.71 15188.71,5724 16054.21,5724 16209.68,5879.48 U1.39
  Bottom Layer w10: R40.2 8450,7100 SW_s1.2@8490,7060
BTSHIFT: R51.2 SW_shift1.2 U1.53 | length 11037
  Top Layer w10: SW_shift1.2@6905,6310 7145,6070 7600,6070 7650,6120 10410,6120 10573,5957 11027,5957 11190,6120 11674.04,6120 11837.04,5957 12197,5957 12330,6090 14283.63,6090 14856.63,5517 16205.08,5517 16594,5905.92 16594,6033 16566.85,6060.15 U1.53
  Bottom Layer w10: R51.2 6864,6609 6864,6351 SW_shift1.2@6905,6310
BTSPACE: R65.2 SW_space1.2 U1.57 | length 6581.9
  Top Layer w10: SW_space1.2@11300,5570 11570,5570 11883,5883 14393.2,5883 14827.2,5449 16233.25,5449 16677,5892.75 16677,6064.04 16602.15,6138.89 U1.57
  Bottom Layer w10: R65.2 11260,5610 SW_space1.2@11300,5570
BTT: R29.2 SW_t1.2 U1.18 | length 6758.3
  Top Layer w10: SW_t1.2@10550,7810 10690,7670 13891.92,7670 14253,7308.92 14253,7149.21 14482.21,6920 15043.21,6920 15409,6554.21 15409,6155.88 15508.88,6056 15591.12,6056 15693.7,6158.57 U1.18
  Bottom Layer w10: R29.2 10510,7850 SW_t1.2@10550,7810
BTTAB: R24.2 SW_tab1.2 U1.29 | length 10909.4
  Top Layer w10: SW_tab1.2 6860,7570 13871.71,7570 14168,7273.71 14168,7114 14460,6822 15021,6822 15324,6519 15324,6120.67 15567.67,5877 15990,5877 16012.83,5899.83 U1.29
  Bottom Layer w10: R24.2 6580,7850 SW_tab1.2
BTU: R31.2 SW_u1.2 U1.16 | length 5246.4
  Top Layer w10: SW_u1.2@12050,7810 12150,7710 13900,7710 14290,7320 14290,7160.29 14490.29,6960 15051.29,6960 15443,6568.29 15443,6169.96 15522.96,6090 15577.04,6090 15684.99,6197.94 U1.16
  Bottom Layer w10: R31.2 12010,7850 SW_u1.2@12050,7810
BTV: R55.2 SW_v1.2 U1.47 | length 6882.8
  Top Layer w10: SW_v1.2@10373,6319 10463.5,6228.5 11018.07,6228.5 11046.57,6200 11731.72,6200 11761.72,6230 12240,6230 12312,6158 14311.79,6158 14884.79,5585 16133.71,5585 16367.17,5818.46 U1.47
  Bottom Layer w10: R55.2 10335,6357 SW_v1.2@10373,6319
BTW: R26.2 SW_w1.2 U1.25 | length 8993.4
  Top Layer w10: SW_w1.2@8300,7810 8500,7610 13879.79,7610 14202,7287.79 14202,7128.08 14474.08,6856 15035.08,6856 15358,6533.08 15358,6134.75 15487.75,6005 15612.25,6005 15628.03,6020.78 U1.25
  Bottom Layer w10: R26.2 8260,7850 SW_w1.2@8300,7810
BTWIN: R62.2 SW_win1.2 U1.54 | length 10271.9
  Top Layer w10: SW_win1.2@7830,5560 8120,5560 8663,6103 10387,6103 10550,5940 11034.04,5940 11197.04,6103 11667,6103 11830,5940 12210,5940 12343,6073 14276.58,6073 14849.58,5500 16212.12,5500 16611,5898.88 16611,6048.12 16579.29,6079.83 U1.54
  Bottom Layer w10: R62.2 7790,5600 SW_win1.2@7830,5560
BTX: R53.2 SW_x1.2 U1.51 | length 8596.1
  Top Layer w10: SW_x1.2@8873,6316 9029,6160 10480,6160 10508.5,6188.5 11001.5,6188.5 11030,6160 11750,6160 11778.5,6188.5 12211.5,6188.5 12276,6124 14297.71,6124 14870.71,5551 16191,5551 16489.21,5849.21 U1.51
  Bottom Layer w10: R53.2 8835,6354 SW_x1.2@8873,6316
BTY: R30.2 SW_y1.2 U1.17 | length 6002.3
  Top Layer w10: SW_y1.2@11300,7810 11420,7690 13895.96,7690 14270,7315.96 14270,7156.25 14486.25,6940 15047.25,6940 15426,6561.25 15426,6162.92 15515.92,6073 15584.08,6073 15689.34,6178.26 U1.17
  Bottom Layer w10: R30.2 11260,7850 SW_y1.2@11300,7810
BTZ: R52.2 SW_z1.2 U1.52 | length 9699.2
  Top Layer w10: SW_z1.2@8123,6316 8299,6140 10418.28,6140 10581.28,5977 11018.72,5977 11181.72,6140 11682.33,6140 11842.33,5980 12190,5980 12317,6107 14290.67,6107 14863.67,5534 16198.04,5534 16577,5912.96 16577,6020 16556.54,6040.46 U1.52
  Bottom Layer w10: R52.2 8085,6354 SW_z1.2@8123,6316
D+: R3.2 R4.2 U1.71 | length 679.5
  Top Layer w10: U1.71 16611.52,6414.48 16657.04,6460 16965,6460 R4.2 17025,6400 R3.2
D-: R2.2 U1.70 | length 715.6
  Top Layer w10: U1.70 16647.61,6394.8 16692.81,6440 16709.81,6440 16902.19,6440 16962.19,6380 17045,6380 R2.2 R2.2@17122.8,6297.8
GND: "SW_\"1.1" C1.1 C2.1 C3.1 C4.1 C5.1 C6.1 C7.1 C8.1 C9.2 C10.2 C11.2 C12.1 D1.2 D2.2 P12.0 P12.6 P13.4 R1.2 R6.1 SW1.1 SW2.1 SW3.1 SW4.1 SW5.1 SW6.1 SW7.1 SW8.1 SW9.1 SW10.1 SW_,1.1 SW_-1.1 SW_.1.1 SW_/1.1 SW_;1.1 SW_=1.1 SW_[1.1 SW_\1.1 SW_]1.1 SW_`1.1 SW_a1.1 SW_alt1.1 SW_altright1.1 SW_b1.1 SW_bak1.1 SW_c1.1 SW_cfg1.1 SW_ctrl1.1 SW_d1.1 SW_e1.1 SW_enter1.1 SW_esc1.1 SW_f1.1 SW_fn1.1 SW_g1.1 SW_h1.1 SW_i1.1 SW_j1.1 SW_k1.1 SW_l1.1 SW_m1.1 SW_n1.1 SW_o1.1 SW_p1.1 SW_q1.1 SW_r1.1 SW_s1.1 SW_shift1.1 SW_space1.1 SW_t1.1 SW_tab1.1 SW_u1.1 SW_v1.1 SW_w1.1 SW_win1.1 SW_x1.1 SW_y1.1 SW_z1.1 U1.10 U1.19 U1.20 U1.27 U1.49 U1.74 U1.99 U2.1 USB1.5 USB1.6 | length 628.9
  Top Layer w10: v1(15790,6117) v1@15792.2,6119.2 ; v1@15810.94,6316.06 U1.10 ; U1.20 v1@15792.2,6119.2 ; U1.19 15811.89,6138.89 v1@15792.2,6119.2 ; v1@15900,5927 v1(15907,5920) 15926,5901 15964,5901 15973.46,5910.46 U1.27 ; U1.49 16406.54,5900.46 v4@16430,5877 ; U1.74 16556.54,6473.54 v1(16590,6507)
  other v1: 17030,5770 15800,5920 16090,6137 17210,6150 15800,6327 16080,6327 16300,6447 15549,6510 17130,6610 15860,6647 16510,6660 17050,6690 16540,6747 15850,6780 16380,6910
  other v4: 16440,5870
NetC7_2: C7.2 U1.12 Y1.1 | length 464.1
  Top Layer w10: Y1.1 15627.82,6276.69 U1.12
  Bottom Layer w10: C7.2 15547.5,6357 Y1.1
NetC8_2: C8.2 U1.13 Y1.2 | length 472.2
  Top Layer w10: Y1.2 15647.5,6257 U1.13
  Bottom Layer w10: C8.2 15547.5,6157 Y1.2
NetD1_1: D1.1 R7.2 | length 158.2
  Top Layer w10: R7.2 17243.15,5678.15 D1.1
NetD2_1: D2.1 R8.2
  other v2: 17250,5860
NetP13_2: P13.2 R2.1 USB1.2 | length 3108.9
  Top Layer w10: R2.1 P13.2
  Bottom Layer w10: USB1.2@16624.41,8973.39 16624.41,8741.55 17193,8172.96 17193,6842.96 17273,6762.96 17273,6377 P13.2
NetP13_3: P13.3 R3.1 USB1.3 | length 2998.3
  Top Layer w10: R3.1 P13.3
  Bottom Layer w10: USB1.3@16650,8973.39 16650,8740 17210,8180 17210,6850 17290,6770 17290,6460 P13.3
NetR9_1: R9.1 SW_esc1.4 | length 92.1
  Bottom Layer w10: R9.1 6395,8960 SW_esc1.4
NetR10_1: R10.1 SW1.4 | length 104.5
  Bottom Layer w10: R10.1 7195,8925 SW1.4@7230,8960
NetR11_1: R11.1 SW2.4 | length 85
  Bottom Layer w10: R11.1@7895,8960 SW2.4@7980,8960
NetR12_1: R12.1 SW3.4 | length 85
  Bottom Layer w10: R12.1@8645,8960 SW3.4@8730,8960
NetR13_1: R13.1 SW4.4 | length 85
  Bottom Layer w10: R13.1@9395,8960 SW4.4@9480,8960
NetR14_1: R14.1 SW5.4 | length 85
  Bottom Layer w10: R14.1@10145,8960 SW5.4@10230,8960
NetR15_1: R15.1 SW6.4 | length 85
  Bottom Layer w10: R15.1@10895,8960 SW6.4@10980,8960
NetR16_1: R16.1 SW7.4 | length 85
  Bottom Layer w10: R16.1@11645,8960 SW7.4@11730,8960
NetR17_1: R17.1 SW8.4 | length 85
  Bottom Layer w10: R17.1@12395,8960 SW8.4@12480,8960
NetR18_1: R18.1 SW9.4 | length 85
  Bottom Layer w10: R18.1@13145,8960 SW9.4@13230,8960
NetR19_1: R19.1 SW10.4 | length 85
  Bottom Layer w10: R19.1@13895,8960 SW10.4@13980,8960
NetR20_1: R20.1 SW_-1.4 | length 85
  Bottom Layer w10: R20.1@14645,8960 SW_-1.4@14730,8960
NetR21_1: R21.1 SW_=1.4 | length 85
  Bottom Layer w10: R21.1@15395,8960 SW_=1.4
NetR22_1: R22.1 SW_\1.4 | length 85
  Bottom Layer w10: R22.1@16145,8960 SW_\1.4
NetR23_2: R23.2 SW_`1.4 | length 92.1
  Bottom Layer w10: R23.2 16895,8960 SW_`1.4
NetR24_1: R24.1 SW_tab1.4 | length 85
  Bottom Layer w10: R24.1@6585,8210 SW_tab1.4
NetR25_1: R25.1 SW_q1.4 | length 85
  Bottom Layer w10: R25.1@7515,8210 SW_q1.4
NetR26_1: R26.1 SW_w1.4 | length 85
  Bottom Layer w10: R26.1@8265,8210 SW_w1.4@8350,8210
NetR27_1: R27.1 SW_e1.4 | length 85
  Bottom Layer w10: R27.1@9015,8210 SW_e1.4@9100,8210
NetR28_1: R28.1 SW_r1.4 | length 85
  Bottom Layer w10: R28.1@9765,8210 SW_r1.4@9850,8210
NetR29_1: R29.1 SW_t1.4 | length 85
  Bottom Layer w10: R29.1@10515,8210 SW_t1.4@10600,8210
NetR30_1: R30.1 SW_y1.4 | length 85
  Bottom Layer w10: R30.1@11265,8210 SW_y1.4@11350,8210
NetR31_1: R31.1 SW_u1.4 | length 85
  Bottom Layer w10: R31.1@12015,8210 SW_u1.4@12100,8210
NetR32_1: R32.1 SW_i1.4 | length 85
  Bottom Layer w10: R32.1@12765,8210 SW_i1.4@12850,8210
NetR33_1: R33.1 SW_o1.4 | length 85
  Bottom Layer w10: R33.1@13515,8210 SW_o1.4@13600,8210
NetR34_1: R34.1 SW_p1.4 | length 85
  Bottom Layer w10: R34.1@14265,8210 SW_p1.4@14350,8210
NetR35_1: R35.1 SW_[1.4 | length 85
  Bottom Layer w10: R35.1@15015,8210 SW_[1.4@15100,8210
NetR36_1: R36.1 SW_]1.4 | length 85
  Bottom Layer w10: R36.1@15765,8210 SW_]1.4@15850,8210
NetR37_1: R37.1 SW_bak1.4 | length 85
  Bottom Layer w10: R37.1@16705,8210 SW_bak1.4
NetR38_1: R38.1 SW_ctrl1.4 | length 85
  Bottom Layer w10: R38.1@6675,7460 SW_ctrl1.4@6760,7460
NetR39_1: R39.1 SW_a1.4 | length 85
  Bottom Layer w10: R39.1@7705,7460 SW_a1.4@7790,7460
NetR40_1: R40.1 SW_s1.4 | length 85
  Bottom Layer w10: R40.1@8455,7460 SW_s1.4@8540,7460
NetR41_1: R41.1 SW_d1.4 | length 85
  Bottom Layer w10: R41.1@9205,7460 SW_d1.4@9290,7460
NetR42_1: R42.1 SW_f1.4 | length 85
  Bottom Layer w10: R42.1@9955,7460 SW_f1.4@10040,7460
NetR43_1: R43.1 SW_g1.4 | length 85
  Bottom Layer w10: R43.1@10705,7460 SW_g1.4@10790,7460
NetR44_1: R44.1 SW_h1.4 | length 85
  Bottom Layer w10: R44.1@11455,7460 SW_h1.4@11540,7460
NetR45_1: R45.1 SW_j1.4 | length 85
  Bottom Layer w10: R45.1@12205,7460 SW_j1.4@12290,7460
NetR46_1: R46.1 SW_k1.4 | length 85
  Bottom Layer w10: R46.1@12955,7460 SW_k1.4@13040,7460
NetR47_1: R47.1 SW_l1.4 | length 85
  Bottom Layer w10: R47.1@13705,7460 SW_l1.4@13790,7460
NetR48_1: R48.1 SW_;1.4 | length 85
  Bottom Layer w10: R48.1@14455,7460 14540,7460
NetR49_1: "SW_\"1.4" R49.1 | length 85
  Bottom Layer w10: R49.1@15205,7460 15290,7460
NetR50_1: R50.1 SW_enter1.4 | length 85
  Bottom Layer w10: R50.1@16425,7460 SW_enter1.4@16510,7460
NetR51_1: R51.1 SW_shift1.4 | length 100.8
  Bottom Layer w20: R51.1 6953,6708 SW_shift1.4@6955,6710
NetR52_1: R52.1 SW_z1.4 | length 90.1
  Bottom Layer w10: R52.1 8168,6711 SW_z1.4@8173,6716
NetR53_1: R53.1 SW_x1.4 | length 90.1
  Bottom Layer w10: R53.1 8918,6711 SW_x1.4@8923,6716
NetR54_1: R54.1 SW_c1.4 | length 90.1
  Bottom Layer w10: R54.1 9668,6711 SW_c1.4@9673,6716
NetR55_1: R55.1 SW_v1.4 | length 88.8
  Bottom Layer w10: R55.1 10421,6717 SW_v1.4@10423,6719
NetR56_1: R56.1 SW_b1.4 | length 85.8
  Bottom Layer w10: R56.1 11171,6714 SW_b1.4@11173,6716
NetR57_1: R57.1 SW_n1.4 | length 88.8
  Bottom Layer w10: R57.1 11921,6711 SW_n1.4@11923,6713
NetR58_1: R58.1 SW_m1.4 | length 91.8
  Bottom Layer w10: R58.1 12671,6714 SW_m1.4@12673,6716
NetR59_1: R59.1 SW_,1.4 | length 91.8
  Bottom Layer w10: R59.1 13421,6714 13423,6716
NetR60_1: R60.1 SW_.1.4 | length 91.8
  Bottom Layer w20: R60.1 14171,6714 SW_.1.4@14173,6716
NetR61_1: R61.1 SW_/1.4 | length 97.4
  Bottom Layer w20: R61.1 14919,6714 SW_/1.4@14920,6713
NetR62_1: R62.1 SW_win1.4 | length 85
  Bottom Layer w10: R62.1@7795,5960 SW_win1.4@7880,5960
NetR63_1: R63.1 SW_alt1.4 | length 85
  Bottom Layer w10: R63.1@8735,5960 SW_alt1.4@8820,5960
NetR64_1: R64.1 SW_fn1.4 | length 85
  Bottom Layer w10: R64.1@9675,5960 SW_fn1.4@9760,5960
NetR65_1: R65.1 SW_space1.4 | length 85
  Bottom Layer w10: R65.1@11265,5970 SW_space1.4@11350,5970
NetR66_1: R66.1 SW_altright1.4 | length 97
  Bottom Layer w10: R66.1@12855,5970 SW_altright1.4@12952,5970
NetR67_1: R67.1 SW_cfg1.4 | length 93
  Bottom Layer w10: R67.1@13795,5960 SW_cfg1.4
PA8: C10.1 R4.1 U1.67 | length 789.6
  Top Layer w10: U1.67@16489.21,6335 R4.1 17000,6290 17130,6160 C10.1
PA9: P12.1 U1.68 | length 680.8
  Top Layer w10: U1.68 16818.43,6355.43 v2(16850,6387) ; v2@16958.43,6501.57 v2(16960,6500) 16960,6591.74 P12.1
  Bottom Layer w10: 16850,6370 16910,6370 16960,6420 v2(16960,6500)
PA10: P12.2 U1.69 | length 563.6
  Top Layer w10: U1.69 16698.11,6375.11 v2(16730,6407) ; v2(16790,6497) 16857,6497 16919.06,6559.06 P12.2@16919.06,6599.06
  Bottom Layer w10: v2(16730,6407) 16730,6437 v2(16790,6497)
PC6: U1.63
PC7: U1.64
PC8: U1.65
PC9: U1.66
PD13: R7.1 U1.60 | length 1039.8
  Top Layer w10: U1.60 16615.22,6197.94 16770,6043.17 16770,5917 16818.5,5868.5 ; 16818.5,5870 17040,5870 17080,5830 17080,5615 R7.1
PD14: U1.61
PD15: U1.62
RESET#: C9.1 R5.2 U1.14 | length 1012.2
  Top Layer w10: U1.14 15891.1,6237 v2(16370,6237) ; v2(16590,6237) 16600.21,6237 16800.21,6037 v2(16820,6037)
  Bottom Layer w10: v2(16370,6237) v2(16590,6237)
SWCLK: P12.5 U1.76 | length 422.4
  Top Layer w10: U1.76 16779.21,6556.21 16800,6577 16800,6617
SWDIO: P12.4 U1.72 | length 445.8
  Top Layer w10: U1.72 16607.17,6434.17 16710,6537 16810,6537 16840,6567 P12.4@16840,6607
TDI: U1.77
TDO/SWO: U1.89
TRST: U1.90
V5: C11.1 P13.1 U2.3 USB1.1 | length 3809.3
  Bottom Layer w20: USB1.1@16598.82,8973.39 16598.82,8701.18 17160,8140 17160,6830 ; U2.3 16723.42,6830 17160,6830 ; C11.1 17290,6140 ; P13.1 17290,6140 ; 17160,6830 17190,6800 17190,6390 17290,6290 17290,6140
V33: "SW_\"1.3" C1.2 C2.2 C3.2 C4.2 C5.2 C6.2 C12.2 P11.2 P12.3 R5.1 R8.1 SW1.3 SW2.3 SW3.3 SW4.3 SW5.3 SW6.3 SW7.3 SW8.3 SW9.3 SW10.3 SW_,1.3 SW_-1.3 SW_.1.3 SW_/1.3 SW_;1.3 SW_=1.3 SW_[1.3 SW_\1.3 SW_]1.3 SW_`1.3 SW_a1.3 SW_alt1.3 SW_altright1.3 SW_b1.3 SW_bak1.3 SW_c1.3 SW_cfg1.3 SW_ctrl1.3 SW_d1.3 SW_e1.3 SW_enter1.3 SW_esc1.3 SW_f1.3 SW_fn1.3 SW_g1.3 SW_h1.3 SW_i1.3 SW_j1.3 SW_k1.3 SW_l1.3 SW_m1.3 SW_n1.3 SW_o1.3 SW_p1.3 SW_q1.3 SW_r1.3 SW_s1.3 SW_shift1.3 SW_space1.3 SW_t1.3 SW_tab1.3 SW_u1.3 SW_v1.3 SW_w1.3 SW_win1.3 SW_x1.3 SW_y1.3 SW_z1.3 U1.6 U1.11 U1.21 U1.22 U1.28 U1.50 U1.75 U1.100 U2.2 U2.4 | length 56586.9
  Top Layer w10: U1.21 U1.22 15897.95,6087 v2(15980,6087) 15980,6047 v2(15993.15,6033.85) ; U1.11 v2@15979.37,6296.37 ; U1.6 15972.2,6394.8 15972.2,6303.54 v2@15979.37,6296.37 ; U1.100 15953.78,6503.22 v2(15970,6487) 15979.37,6477.63 v2@15979.37,6296.37 ; U1.28 v2(15993.15,6033.85) ; U1.50 16426.22,6010.78 v2(16400,6037) ; U1.75 16426.22,6493.22 v2(16410,6477) 16410,6047 v2(16400,6037) ; v2(15993.15,6033.85) 16083.85,6033.85 16130,6080 16357,6080 v2(16400,6037)
  Top Layer w20: SW_\1.3 16840,8960 16920,9040 17000,9040 SW_`1.3 ; P12.3@16879.68,6610.32 v1(16880,6660)
  Bottom Layer w10: C4.2 v2(15980,6307) ; C5.2 16485,5952 R5.1 16928,5952 P11.2 17075,5930 R8.1
  Bottom Layer w20: SW_esc1.3 6660,9040 7335,9040 ; SW_tab1.3 6850,8290 8450,8290 ; SW_ctrl1.3@6860,7460 6940,7540 7890,7540 ; SW_shift1.3@7055,6699 7536,6699 7627,6790 8274,6790 ; SW1.3 7334,9039 7335,9040 ; SW_q1.3 7700,8280 ; SW_a1.3@7890,7460 7890,7540 ; SW_win1.3@7980,5960 8060,6040 8920,6040 ; SW2.3@8080,8960 8080,9040 ; SW_z1.3@8274,6720 8274,6790 ; SW_w1.3@8450,8210 8450,8290 ; SW_s1.3@8640,7460 8640,7530 ; SW3.3@8830,8960 8830,9030 ; SW_alt1.3@8920,5960 8920,6040 ; SW_x1.3@9021,6710 9021,6790 ; SW_e1.3@9200,8210 9200,8290 ; SW_d1.3@9390,7460 9390,7540 ; SW4.3@9580,8960 9580,9040 ; SW_c1.3@9771,6710 9771,6790 ; SW_fn1.3@9860,5960 9860,6040 ; SW_r1.3@9950,8210 9950,8280 ; SW_f1.3@10140,7460 10140,7540 ; SW5.3@10330,8960 10330,9030 ; SW_v1.3@10521,6720 10521,6790 ; SW_t1.3@10700,8210 10700,8290 ; SW_g1.3@10890,7460 10890,7530 ; SW6.3@11080,8960 11080,9040 ; SW_b1.3@11274,6710 11274,6790 ; SW_y1.3@11450,8210 11450,8290 ; SW_h1.3@11640,7460 11640,7540 ; SW7.3@11830,8960 11830,9040 ; SW_n1.3@12021,6710 12021,6790 ; SW_u1.3@12200,8210 12200,8280 ; SW_j1.3@12390,7460 12390,7540 ; SW8.3@12580,8960 12580,9030 ; SW_m1.3@12772,6716 12772,6786 ; SW_i1.3@12950,8210 12950,8290 ; SW_altright1.3@13050,5970 13050,6040 ; SW_k1.3@13140,7460 13140,7530 ; SW9.3@13330,8960 13330,9030 ; 13524,6710 13524,6790 ; SW_o1.3@13700,8210 13700,8290 ; SW_l1.3@13890,7460 13890,7540 ; 13899,6787 13899,6040 ; SW_cfg1.3@13984,5956 13984,5966 13910,6040 13899,6040 ; SW10.3@14080,8960 14080,9040 ; SW_.1.3@14273,6716 14273,6789 14274,6790 ; SW_p1.3@14450,8210 14450,8280 14460,8290 ; 14649,7460 14649,7540 ; SW_-1.3@14830,8960 14830,9030 14840,9040 ; SW_/1.3@15020,6713 15020,6789 ; SW_[1.3@15200,8210 15200,8290 ; SW_=1.3 15580,9040 ; SW_]1.3@15950,8210 15950,8290 ; v2(16410,6477) 16493,6560 16550,6560 U2.4@16567.13,6577.13 ; C12.2 16410,6660 16492.87,6577.13 U2.4 ; SW_enter1.3@16610,7460 16570,7500 ; U2.2@16620,6860 U2.2 U2.4 ; 16640,7500 16570,7500 ; v1(16880,6660) 16702.87,6660 U2.4 ; SW_bak1.3 16810,8290 16570,8290 ; 7335,9040 8080,9040 ; 7890,7540 9390,7540 ; 8080,9040 9580,9040 ; 8274,6790 9021,6790 ; 8450,8290 9200,8290 ; 8920,6040 9860,6040 ; 9021,6790 9771,6790 ; 9200,8290 10700,8290 ; 9390,7540 10140,7540 ; 9580,9040 11080,9040 ; 9771,6790 10521,6790 ; 9860,6040 10440,6040 10540,5940 10980,5940 11090,6050 11370,6050 11452,5968 12698,5968 12770,6040 13050,6040 ; 10140,7540 11640,7540 ; 10521,6790 11274,6790 ; 10700,8290 11450,8290 ; 11080,9040 11830,9040 ; 11274,6790 12021,6790 ; 11450,8290 12950,8290 ; 11640,7540 12390,7540 ; 11830,9040 14080,9040 ; 12021,6790 13524,6790 ; 12390,7540 13890,7540 ; 12950,8290 13700,8290 ; 13050,6040 13899,6040 ; 13524,6790 14274,6790 ; 13700,8290 14460,8290 ; 13890,7540 14649,7540 ; 14080,9040 14840,9040 ; 14274,6790 15019,6790 15020,6789 ; 14460,8290 15200,8290 ; 14649,7540 15021,7540 ; 14840,9040 15580,9040 ; 15020,6789 15020,7539 15021,7540 ; 15021,7540 15310,7540 15390,7460 15570,7640 16430,7640 16570,7500 ; 15200,8290 15950,8290 ; 15580,9040 16250,9040 SW_\1.3 16410,8960 16570,8800 16570,8290 ; 15950,8290 16570,8290 ; 16570,7500 16570,8290
  Bottom Layer w30: U2.2@16620,6860 16840,7080 16840,7300 16640,7500
pads on no net: "SW_\"1." P1.0 P1.1 P1.3 P1.4 P9.0 P9.1 P9.3 P9.4 P10.0 P10.1 P10.3 P10.4 P14.0 P14.1 P14.3 P14.4 SW1. SW2. SW3. SW4. SW5. SW6. SW7. SW8. SW9. SW10. SW_,1. SW_-1. SW_.1. SW_/1. SW_;1. SW_=1. SW_[1. SW_\1. SW_]1. SW_`1. SW_a1. SW_alt1. SW_altright1. SW_b1. SW_bak1. SW_c1. SW_cfg1. SW_ctrl1. SW_d1. SW_e1. SW_enter1. SW_esc1. SW_f1. SW_fn1. SW_g1. SW_h1. SW_i1. SW_j1. SW_k1. SW_l1. SW_m1. SW_n1. SW_o1. SW_p1. SW_q1. SW_r1. SW_s1. SW_shift1. SW_space1. SW_t1. SW_tab1. SW_u1. SW_v1. SW_w1. SW_win1. SW_x1. SW_y1. SW_z1. U1.7 U1.8 U1.9 U1.73 USB1. USB1.4
copper on no net:
  other v3: 6250,5500 17300,5500 6270,6900 17290,6900 11210,7260 7164,8028 16410,8030 6250,8350 17300,8350

## Polygon pours and split planes (outlines as drawn)
GND on Bottom Layer "Top Layer-No Net1" (solid, remove dead copper, pour order 4): 6154.04,5540 6154.04,9042.15 cw(c6250,9042.15) 6250,9138.1 17300,9138.1 cw(c17300,9034) 17404.1,9034 17404.1,5500 cw(c17302.05,5502.05) 17300,5400 6300,5400 cw(c6297.02,5542.98)
GND on Top Layer "Top Layer-No Net1" (solid, remove dead copper, pour order 3): 6154.04,5540 6154.04,9042.15 cw(c6250,9042.15) 6250,9138.1 17300,9138.1 cw(c17300,9034) 17404.1,9034 17404.1,5500 cw(c17302.05,5502.05) 17300,5400 6300,5400 cw(c6297.02,5542.98)

## Keep-outs
Keep-Out Layer:
  the board outline again, w5

## Silkscreen, mask and mechanical layers (free items; w line width, h text height)
Top Overlay:
  drawing of 2105 lines, arcs and shapes, not listed
  text "G" at 17250,6480 h40
  text "+" at 17250,6380 h40
  text "-" at 17250,6280 h40
  text "V5" at 17220,6180 h40
  text "2017-12-17 BJTU YZ" at 15350,5630 h80
Mechanical 1:
  drawing of 1483 lines, arcs and shapes, not listed

## Text inside footprints (layer, text, board x,y; h text height)
USB1: Bottom Overlay "+" at 16520.08,8967.48 h39.37 r180